# Altium PCB 3-D-Version-Multi_HUTSCHIENE_1_1.PcbDoc
Units mm, origin at the board's own origin, x right, y up, seen from the top; angles counter-clockwise.
Board outline 29.21 x 81.99 mm, 4 copper layers (Top Layer, 3V3, GND, Bottom Layer), stack 0.778 mm thick; 61 components, 55 nets, 681 pads, 79 vias.
Unrouted connection lines stored in the file: 1.
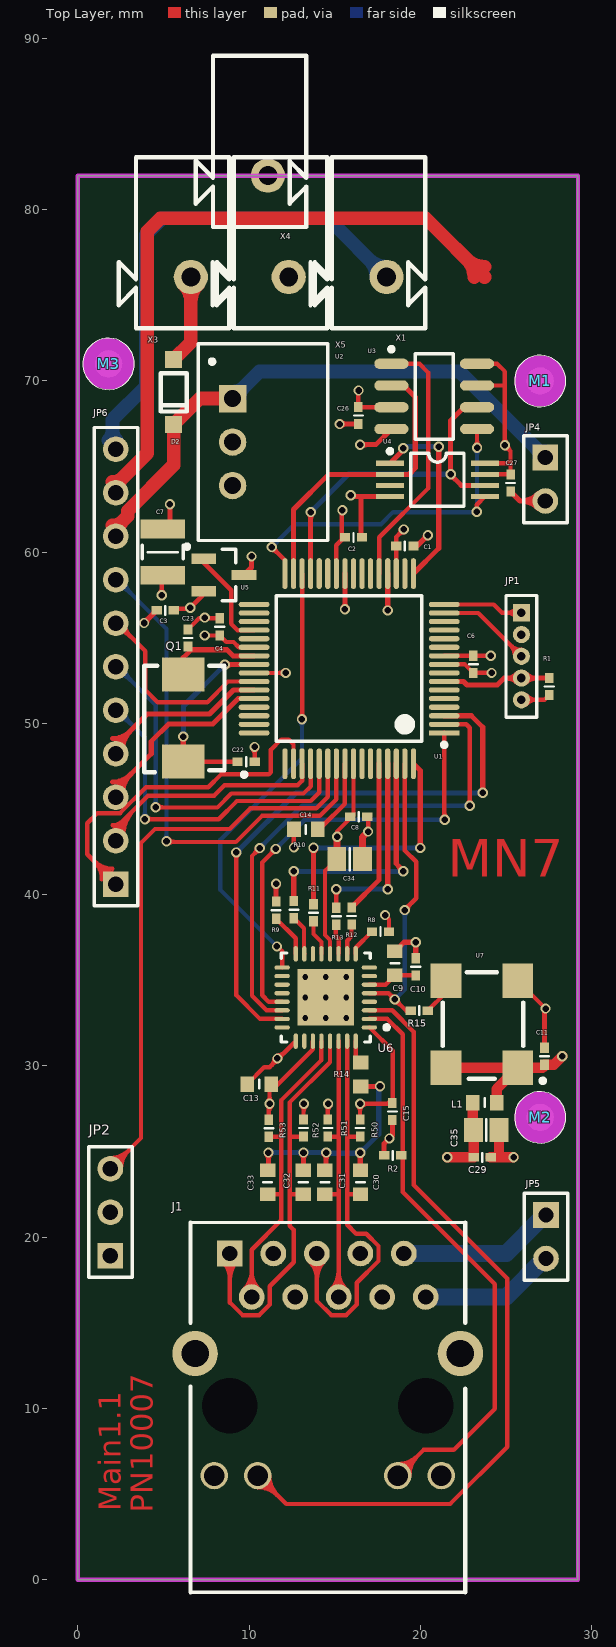
[diagram p0: Top Layer view]
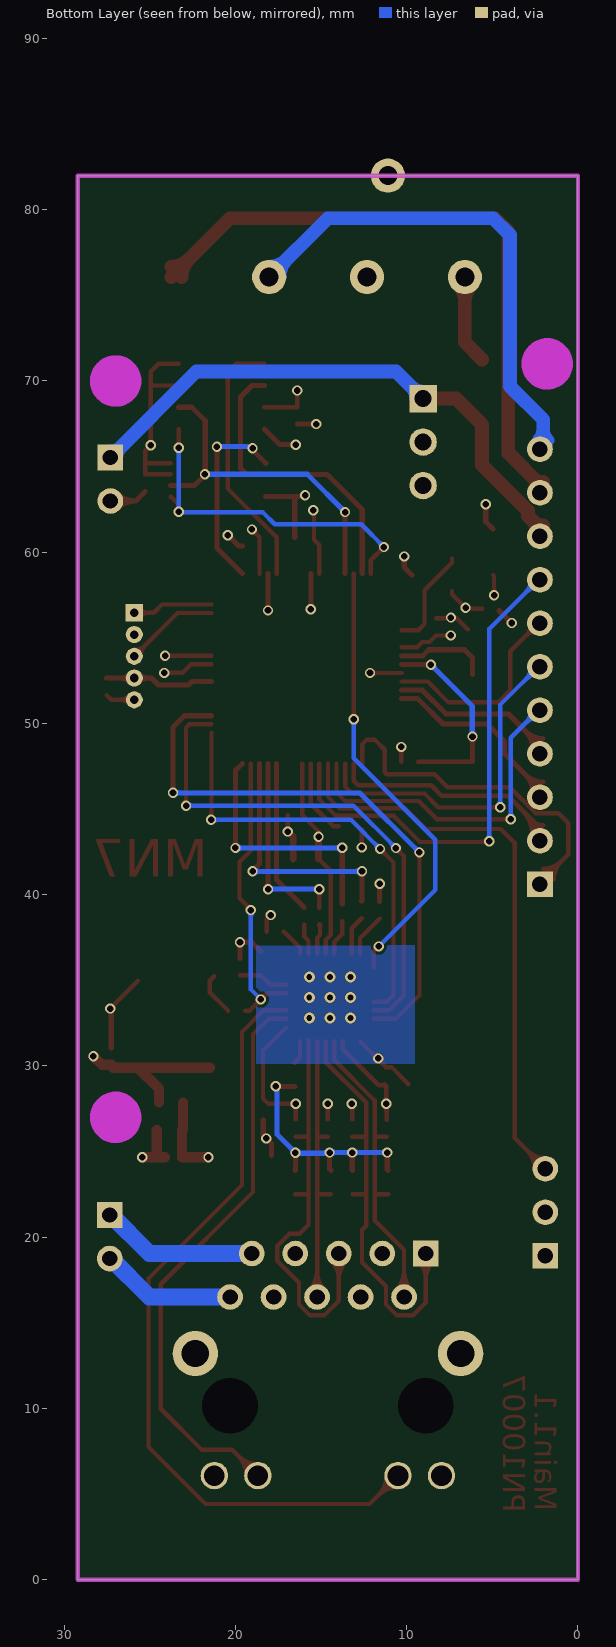
[diagram p1: Bottom Layer view, seen from below]
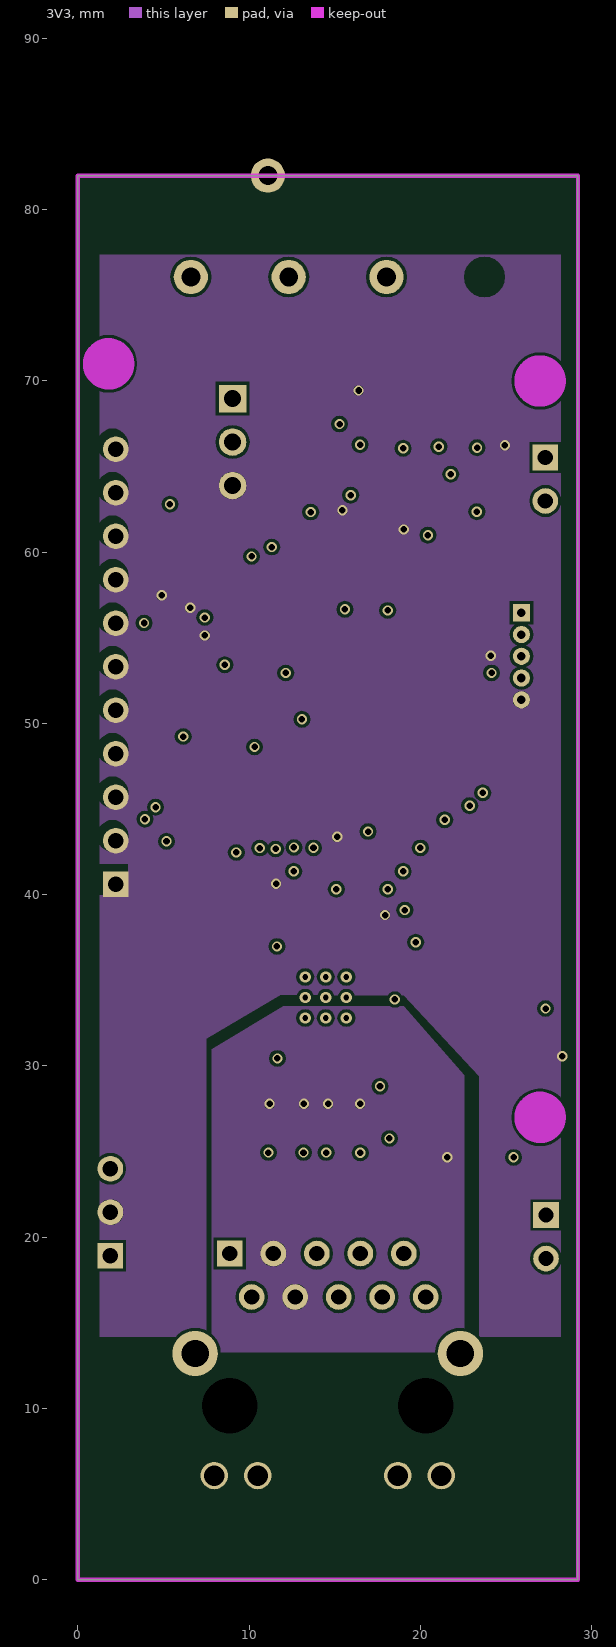
[diagram p2: 3V3]
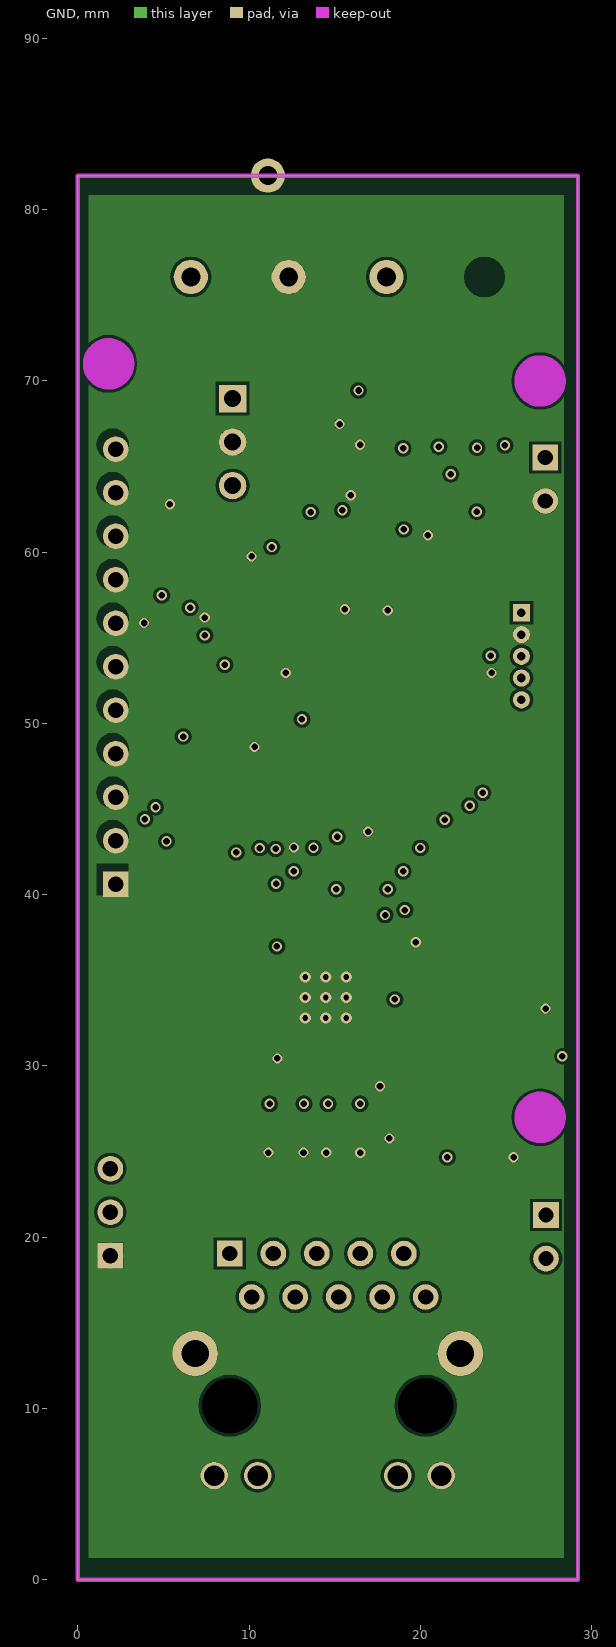
[diagram p3: GND]

## Layer stack, top to bottom
Top Solder: solder mask 0.0102, Solder Resist, Dk 3.5
Top Layer: signal copper 0.0356
Dielectric 1: core 0.254, FR-4, Dk 4.2
3V3: signal copper 0.036
Dielectric 3: prepreg 0.127, Dk 4.2
GND: signal copper 0.036
Dielectric 2: core 0.254, Dk 4.2
Bottom Layer: signal copper 0.0356
Bottom Solder: solder mask 0.0102, Solder Resist, Dk 3.5

## Board outline
0,0 0,81.991 29.21,81.991 29.21,0

## Design rules (kind name [scope] priority, off if disabled: settings)
Clearance AT90 [IsPad vs IsPad] p1: gap=0.1
Clearance [All] p2: gap=0.18
ComponentClearance ComponentClearance_1 [(HasFootprint('WAGO-243-211') AND HasFootprint('WAGO-243-211'))] p1: gap=0 collisioncheckmode=3 verticalgap=0 showdistances=FALSE
ComponentClearance [All] p2: gap=0.254 collisioncheckmode=3 verticalgap=0.254 showdistances=FALSE
HoleSize [All] p1: absolutevalues=TRUE maxlimit=4 minlimit=0.025 maxpercent=80.000 minpercent=20.000
MinimumAnnularRing [HasFootprint('32M1-A_M')] p1: minimumring=0.12
MinimumSolderMaskSliver MinimumSolderMaskSliver_2 [HasFootprint('HDR1X5-1.27')] p1: minsoldermaskwidth=0.05
MinimumSolderMaskSliver MinimumSolderMaskSliver_1 [HasFootprint('32M1-A_M')] p2: minsoldermaskwidth=0
MinimumSolderMaskSliver [All] p3: minsoldermaskwidth=0.1
PolygonConnect [All vs (InNet('GND') AND InPadClass('All Pads'))] p1: connectstyle=Relief reliefconductorwidth=0.254 reliefentries=4 polygonreliefangle="90 Angle" airgapwidth=0
RoomDefinition Ethernet [InComponentClass('Ethernet')] p1: confinementstyle=ConfineIn formatcopy=TRUE lockcomponents=FALSE outline -7.874,-2.972 48.336,-2.972 48.336,87.249 -7.874,87.249
RoomDefinition MCU [InComponentClass('MCU')] p2: confinementstyle=ConfineIn formatcopy=TRUE lockcomponents=FALSE outline -6.35,-3.334 50.838,-3.334 50.838,86.36 -6.35,86.36
RoutingVias [All] p1: holewidth=0.381 width=0.584 viastyle="Through Hole" minholewidth=0.3 minwidth=0.3 maxholewidth=0.711 maxwidth=1.27
ShortCircuit ShortCircuit_1 [U6 vs IsVia] p1: allowed=TRUE
ShortCircuit [All] p2: allowed=FALSE
SilkToBoardRegionClearance [(HasFootprint('7499210121A') AND IsEmbeddedBoard)] p1:
SilkToSilkClearance [All] p1: silktosilkclearance=0.13
SilkToSolderMaskClearance [IsPad] p1: minsilkscreentomaskgap=0.13 clearancetoexposedcopper=TRUE
SolderMaskExpansion [All] p1: expansion=0.102
Width [All] p1: maxlimit=2 minlimit=0.254 preferedwidth=0.254
22 further rules are at their usual default settings.

## Classes and differential pairs
component class Ethernet: C9 C10 C11 C13 C15 C29 C30 C31 C32 C33 C34 C35 J1 JP4 JP5 L1 R2 R8 R9 R10 R11 R12 R13 R14 R15 R50 R51 R52 R53 U6 U7
component class MCU: C1 C3 C4 C6 C7 C8 C14 C22 C23 C26 C27 D2 JP1 JP2 JP6 M1 M2 M3 Q1 R1 U1 U2 U3 U4 U5 X1 X3 X4 X5

## Components (designator, comment, footprint, x,y, rotation, side; value= is the part's Value field where it differs from the comment)
C1 "100nF16V_0402" C0402 19.101,60.363 r0 top
C2 "100nF16V_0402" C0402 16.104,60.871 r0 top
C3 "100nF16V_0402" C0402 5.105,56.604 r180 top
C4 "100nF16V_0402" C0402 8.293,55.639 r90 top
C6 "100nF16V_0402" C0402 23.101,53.454 r270 top
C7 "10uF25V_1210" C1210 4.966,60.008 r90 top
C8 "100nF25V_0402" C0402 16.408,44.552 r0 top
C9 "1uF50V_0603" C0603 18.517,35.992 r90 top
C10 "470pF50V_0402" C0402 19.736,35.789 r90 top
C11 "100nF16V_0402" C0402 27.254,30.569 r90 top
C13 "22nF50V_0603" C0603 10.604,28.943 r180 top
C14 "10uF10V_0603" C0603 13.322,43.815 r180 top
C15 "100nF25V_0402" C0402 18.377,27.343 r270 top
C22 "22pF50V_0402" C0402 9.83,47.765 r0 top
C23 "22pF50V_0402" C0402 6.439,54.991 r90 top
C26 "100nF16V_0402" C0402 16.383,67.983 r270 top
C27 "100nF16V_0402" C0402 25.273,64.041 r270 top
C29 "100nF25V_0402" C0402 23.622,24.663 r0 top
C30 "10pF50V_0603" C0603 16.51,23.216 r90 top
C31 "10pF50V_0603" C0603 14.427,23.216 r90 top
C32 "10pF50V_0603" C0603 13.17,23.216 r90 top
C33 "10pF50V_0603" C0603 11.087,23.216 r90 top
C34 "4u7F25V_0805" C0805 15.875,42.075 r0 top
C35 "4u7F25V_0805" C0805 23.851,26.264 r0 top
D2 "SD103AW-V-GS08" SOD123 5.601,69.355 r270 top
J1 "7499210121A" 7499210121A 14.6,10.16 r180 top locked
JP1 "ICDI" HDR1X5-1.27 25.908,53.924 r270 top
JP2 "Header-3" HDR1X3 1.905,21.463 r90 top
JP4 "Header-2" HDR1X2 27.305,64.262 r270 top
JP5 "Header-2" HDR1X2 27.343,20.028 r270 top
JP6 "Header 11_2.54" HDR1X11_2.54 2.222,40.615 r90 top
L1 "120R4A_0603" L0603 23.762,27.864 r0 top
M1 "Mark" Mark-3mm 27,70 r0 top
M2 "Mark" Mark-3mm 27,27 r0 top
M3 "Mark" Mark-3mm 1.8,71 r0 top
Q1 "7A-8.000MAAJ-T" TXC_7A 6.159,50.317 r90 top
R1 "10k_0402" R0402 27.534,52.159 r270 top
R2 "10k_0402" R0402 18.39,24.778 r0 top
R8 "10k_0402" R0402 17.678,37.846 r0 top
R9 "1k5_0402" R0402 11.582,39.103 r90 top
R10 "10R_0402" R0402 12.624,39.129 r90 top
R11 "10R_0402" R0402 13.767,38.951 r90 top
R12 "10R_0402" R0402 15.989,38.76 r270 top
R13 "10R_0402" R0402 15.1,38.748 r90 top
R14 "12k1_0603" R0603(1608) 16.535,29.502 r90 top
R15 "33R_0402" R0402 19.939,33.236 r180 top
R50 "49R9_0402" R0402 16.485,26.378 r90 top
R51 "49R9_0402" R0402 14.605,26.378 r90 top
R52 "49R9_0402" R0402 13.183,26.378 r90 top
R53 "49R9_0402" R0402 11.163,26.365 r90 top
U1 "PIC32MX695F512H-80I/PT" TQFP-64_N1 15.85,53.2 r180 top
U2 "R-783.3-0.5" R-783_3-0_5 9.042,66.434 r270 top
U3 "25LC1024-I_SM" SOP8_N 20.815,69.101 r0 top
U4 "23LC1024-I_ST" TSSOP8 21.006,64.224 r270 top
U5 "11AA02E48T-I_TT" SOT23_M 8.534,58.674 r0 top
U6 "LAN8741-EN" 32M1-A_M 14.482,34 r180 top
U7 "TXC-7W-50.000MBB-T" TXC_7W 23.597,32.436 r90 top
X1 "Terminal-Wago" WAGO-243-211 18.034,76.073 r0 top
X3 "Terminal-Wago" WAGO-243-211 6.604,76.073 r0 top
X4 "Terminal-Wago" WAGO-243-211 11.1,81.991 r0 top
X5 "Terminal-Wago" WAGO-243-211 12.319,76.073 r0 top

## Footprints (in the part's own frame and the unit in brackets; to place one, negate y for a bottom-side part, rotate by r counter-clockwise, add the part's x,y. Pads: shape width x height; smd on the part's side, far side on the other; paste and mask are expansions set on the pad)
32M1-A_M [mm] "QFN, 32-Leads, Body 5x5mm, Pitch 0.5mm, IPC Low Density"
  oval 0.9x0.25 smd: 1(-2.55,1.75) 2(-2.55,1.25) 3(-2.55,0.75) 4(-2.55,0.25) 5(-2.55,-0.25) 6(-2.55,-0.75) 7(-2.55,-1.25) 8(-2.55,-1.75) 17(2.55,-1.75) 18(2.55,-1.25) 19(2.55,-0.75) 20(2.55,-0.25) 21(2.55,0.25) 22(2.55,0.75) 23(2.55,1.25) 24(2.55,1.75)
  oval 0.25x0.9 smd: 9(-1.75,-2.55) 10(-1.25,-2.55) 11(-0.75,-2.55) 12(-0.25,-2.55) 13(0.25,-2.55) 14(0.75,-2.55) 15(1.25,-2.55) 16(1.75,-2.55) 25(1.75,2.55) 26(1.25,2.55) 27(0.75,2.55) 28(0.25,2.55) 29(-0.25,2.55) 30(-0.75,2.55) 31(-1.25,2.55) 32(-1.75,2.55)
  rect 3.3x3.3 smd: 33(0,0)
  silkscreen extent -3.68,-2.6 2.6,2.6, body extent -2.58,-2.58 2.58,2.58, height 1
7499210121A [mm] "Connector; PCB Jack, Thru-Hole; RJ45,POE; Shielded with Lightpipes; Right Angle"
  rect 1.5x1.5 hole 0.9: 1(5.715,-8.89)
  round 1.5 hole 0.9: 2(4.445,-6.35) 3(3.175,-8.89) 4(1.905,-6.35) 5(0.635,-8.89) 6(-0.635,-6.35) 7(-1.905,-8.89) 8(-3.175,-6.35) 9(-4.445,-8.89) 10(-5.715,-6.35)
  round 1.6 hole 1.2: 11(4.09,4.08) 12(6.63,4.08) 13(-4.09,4.08) 14(-6.63,4.08)
  round 2.65 hole 1.6: MH1(-7.745,-3.05) MH2(7.745,-3.05)
  round 2.95 hole 3.25 unplated: MH3(-5.715,0) MH4(5.715,0)
  silkscreen extent -8.02,-10.7 8.02,10.89, body extent -8,-10.67 8,11.18, height 13.74
C0402 [mm] "Chip Capacitor, Body 1.0x0.5mm, IPC High Density"
  rect 0.6x0.5 smd: 1(-0.5,0) 2(0.5,0)
  silkscreen extent 0,-0.25 0,0.25, body extent -0.55,-0.3 0.55,0.3, height 0.5
C0603 [mm] "Chip Capacitor, 0603"
  rect 0.8x0.9 smd: 1(-0.7,0) 2(0.7,0)
  silkscreen extent 0,-0.25 0,0.25, body extent -0.87,-0.48 0.87,0.48, height 0.6
C0805 [mm] "Chip Capacitor, Body 2.0x1.3mm, IPC High Density"
  rect 1.1x1.4 smd: 1(-0.75,0) 2(0.75,0)
  silkscreen extent 0,-0.64 0,0.64, body extent -1.1,-0.72 1.1,0.72, height 1.4
C1210 [mm] "Chip Capacitor, Body 3.2x2.5mm, IPC High Density"
  rect 1.1x2.6 smd: 1(-1.35,0) 2(1.35,0)
  silkscreen extent -0.4,-1.2 0.4,1.2, body extent -1.7,-1.35 1.7,1.35, height 1.3
HDR1X2 [mm] "Connector; Header; 2 Position"
  rect 1.5x1.5 hole 0.9: 1(-1.27,0)
  round 1.5 hole 0.9: 2(1.27,0)
  silkscreen extent -2.54,-1.27 2.54,1.27, body extent -2.54,-1.27 2.54,1.27, height 7
HDR1X3 [mm] "Connector; Header; 3 Position"
  rect 1.5x1.5 hole 0.9: 1(-2.54,0)
  round 1.5 hole 0.9: 2(0,0) 3(2.54,0)
  silkscreen extent -3.81,-1.27 3.81,1.27, body extent -3.81,-1.27 3.81,1.27, height 7
HDR1X5-1.27 [mm] "Connector; Header; 5 Position"
  rect 1x1 hole 0.5: 1(-2.54,0)
  round 1 hole 0.5: 2(-1.27,0) 3(0,0) 4(1.27,0) 5(2.54,0)
  silkscreen extent -3.55,-0.9 3.55,0.9, body extent -3.56,-0.89 3.56,0.89, height 7
HDR1X11_2.54 [mm] "Connector; Header; 11 Position"
  rect 1.5x1.5 hole 0.9: 1(0,0)
  round 1.5 hole 0.9: 2(2.54,0) 3(5.08,0) 4(7.62,0) 5(10.16,0) 6(12.7,0) 7(15.24,0) 8(17.78,0) 9(20.32,0) 10(22.86,0) 11(25.4,0)
  silkscreen extent -1.27,-1.27 26.67,1.27, body extent -1.27,-1.27 26.67,1.27, height 7
L0603 [mm] "Chip Ferrit, 0603"
  rect 0.8x0.9 smd: 1(-0.7,0) 2(0.7,0)
  silkscreen extent 0,-0.25 0,0.25, body extent -0.87,-0.48 0.87,0.48, height 0.6
Mark-3mm [mm]
  round 1.6 smd paste-2: 0(0,0)
  Keep-Out Layer circle w2: c0,0 r0.5
  silkscreen extent -1.5,-1.5 1.5,1.5
R0402 [mm] "Chip Resistor, Body 1.0x0.5mm"
  rect 0.6x0.5 smd: 1(-0.5,0) 2(0.5,0)
  silkscreen extent 0,-0.25 0,0.25, body extent -0.55,-0.3 0.55,0.3, height 0.55
R0603(1608) [mm] "Chip Resistor, 0603"
  rect 0.8x0.9 smd: 1(-0.7,0) 2(0.7,0)
  body extent -0.87,-0.48 0.87,0.48, height 0.6
R-783_3-0_5 [mm] "Recon DC-DC"
  rect 1.6x1.6 hole 1: 1(-2.54,0)
  round 1.6 hole 1: 2(0,0) 3(2.54,0)
  silkscreen extent -5.75,-2 5.75,5.55, body extent -5.72,-2.03 5.72,5.59, height 10.2
SOD123 [mm]
  rect 1x1 smd: 1(1.905,0) 2(-1.905,0)
  silkscreen extent -1.1,-0.76 1.14,0.76, body extent -1.4,-0.85 1.4,0.88, height 1.4
SOP8_N [mm] "SOIC, 8-Leads, Body 4.9x3.9mm, Pitch 1.27mm, IPC Medium Density"
  oval 2x0.6 smd: 1(-2.5,1.905) 2(-2.5,0.635) 3(-2.5,-0.635) 4(-2.5,-1.905) 5(2.5,-1.905) 6(2.5,-0.635) 7(2.5,0.635) 8(2.5,1.905)
  silkscreen extent -2.62,-2.5 1.1,2.88, body extent -2,-2.5 2,2.5, height 1.75
SOT23_M [mm] "SOT23, 3-Leads, Body 2.9x1.3mm, Pitch 0.95mm, Lead Span 2.3mm - Reverse Pinning, IPC Low Density"
  rect 1.45x0.6 smd: 1(1.175,0) 2(-1.175,-0.95) 3(-1.175,0.95)
  silkscreen extent -2.28,-1.5 0.7,1.78, body extent -0.7,-1.5 0.7,1.5, height 1.1
TQFP-64_N1 [mm] "64-Pin Thin Plastic Quad Flat Pack 0.5 mm Pitch, 1.0/0.1 mm Lead Form, IPC Medium Density"
  rect 1.8x0.3 smd: 1(-5.55,3.75)
  oval 1.8x0.3 smd: 2(-5.55,3.25) 3(-5.55,2.75) 4(-5.55,2.25) 5(-5.55,1.75) 6(-5.55,1.25) 7(-5.55,0.75) 8(-5.55,0.25) 9(-5.55,-0.25) 10(-5.55,-0.75) 11(-5.55,-1.25) 12(-5.55,-1.75) 13(-5.55,-2.25) 14(-5.55,-2.75) 15(-5.55,-3.25) 16(-5.55,-3.75) 33(5.55,-3.75) 34(5.55,-3.25) 35(5.55,-2.75) 36(5.55,-2.25) 37(5.55,-1.75) 38(5.55,-1.25) 39(5.55,-0.75) 40(5.55,-0.25) 41(5.55,0.25) 42(5.55,0.75) 43(5.55,1.25) 44(5.55,1.75) 45(5.55,2.25) 46(5.55,2.75) 47(5.55,3.25) 48(5.55,3.75)
  oval 0.3x1.8 smd: 17(-3.75,-5.55) 18(-3.25,-5.55) 19(-2.75,-5.55) 20(-2.25,-5.55) 21(-1.75,-5.55) 22(-1.25,-5.55) 23(-0.75,-5.55) 24(-0.25,-5.55) 25(0.25,-5.55) 26(0.75,-5.55) 27(1.25,-5.55) 28(1.75,-5.55) 29(2.25,-5.55) 30(2.75,-5.55) 31(3.25,-5.55) 32(3.75,-5.55) 49(3.75,5.55) 50(3.25,5.55) 51(2.75,5.55) 52(2.25,5.55) 53(1.75,5.55) 54(1.25,5.55) 55(0.75,5.55) 56(0.25,5.55) 57(-0.25,5.55) 58(-0.75,5.55) 59(-1.25,5.55) 60(-1.75,5.55) 61(-2.25,5.55) 62(-2.75,5.55) 63(-3.25,5.55) 64(-3.75,5.55)
  silkscreen extent -5.68,-4.25 4.25,4.57, body extent -5,-5 5,5, height 1.2
TSSOP8 [mm] "Shrink Small Outline, Plastic, Thin; 8 Leads; Body Width 4.4 mm; Pitch 0.65 mm"
  rect 0.3x1.65 smd: 1(-0.975,-2.775) 2(-0.325,-2.775) 3(0.325,-2.775) 4(0.975,-2.775) 5(0.975,2.775) 6(0.325,2.775) 7(-0.325,2.775) 8(-0.975,2.775)
  silkscreen extent -1.8,-2.9 1.55,1.55, body extent -1.52,-1.52 1.52,1.52, height 1
TXC_7A [mm]
  rect 2x2.5 smd: 1(-2.54,0) 2(2.54,0)
  silkscreen extent -3.43,-3.68 3.05,2.29, body extent -3.17,-2.41 3.05,2.25, height 1.3
TXC_7W [mm]
  rect 2x1.8 smd: 1(-2.54,-2.1) 2(2.54,-2.1) 3(2.54,2.1) 4(-2.54,2.1)
  silkscreen extent -3.43,-3.68 3.05,2.29, body extent -3.17,-2.41 3.05,2.25, height 1.3
WAGO-243-211 [mm]
  round 2 hole 1.1: 1(0,0)
  silkscreen extent -4.2,-3 2.25,7, body extent -4.19,-3.05 2.29,6.98, height 10

## Part data
C1 C2 C3 C4 C6 C7 C11 C14 C26 C27: "Capacitor"
C8 C15 C29: "AVX, X5R, 10%, 25V"
C9: "C series, X5R, 10%"
C10: "AVX, 50V"
C13: "AVX ,  X7R, 5%, 50V"
C22 C23: "Murata, GRM series, 50V"
C30 C31 C32 C33: "AVX ,  +-0.5pF, 50V"
C34 C35: "TDK  C series, X7R, 10%, 25V"
D2: "Diode Schottky,2A,40V"
J1: library part "Ethernet, POE, WE7499210121A", "Modular Jack , Right Angle RJ-45, Low Profile"
JP1 JP4 JP5: "Header, 5-Pin"
JP2: "Header-3-Pin"
JP6: "Header, 11-Pin"
L1: "Murata, Ferrit, 120Rx2A"
Q1: library part Crystal_8MHz, "Crystal, 7A-8.000MAAJ-T"
R1 R2 R8 R9 R10 R11 R12 R13: "Vishay CRCW series, 125mW, 1%"
R14: "Vishay, CRCW series, 100mW, 1%"
R15 R50 R51 R52 R53: "Vishay CRCW series, 63mW, 1%"
U1: "High Performance ROM-less Microcontroller with External Memory Bus, 1.5K RAM, 64-Pin TQFP, 4.2 to 5.5V Supply Range, Industrial Temperature"
U2: library part Recom-R-783_3-0_5, "Voltage Regulator"
U3: "1024 Kbit Serial SPI Bus EEPROM"
U4: "1 Mbit Serial  EEPROM"
U5: "2 kbit Serial  EEPROM"
U6: "Ethernet Phy"
U7: "Crystal"
X1 X3 X4 X5: "BNC Elbow Connector"

## Free pads (board coordinates)
  round 0.584 on Mech13: 1(1.981,29.058) 1(2.515,38.684) 1(3.505,27.203) 1(4.724,24.308) 1(4.851,30.328) 1(5.512,71.196) 1(5.664,62.382) 1(5.994,63.703) 1(5.994,65.684) 1(5.994,67.183) 1(7.01,35.687) 1(7.01,40.183) 1(8.407,59.182) 1(8.509,36.703) 1(8.661,24.181) 1(8.712,29.388) 1(8.712,32.309) 1(8.992,53.188) 1(9.119,54.966) 1(9.525,25.578) 1(10.008,41.707) 1(12.014,44.602) 1(12.014,51.689) 1(12.014,60.706) 1(12.497,34.696) 1(12.497,46.203) 1(12.7,40.03) 1(12.751,56.109) 1(13.513,46.355) 1(13.767,71.171) 1(13.995,44.704) 1(14.021,50.8) 1(14.503,30.683) 1(14.503,36.195) 1(14.503,37.186) 1(14.503,38.202) 1(14.503,57.201) 1(14.834,66.192) 1(15.189,40.691) 1(15.443,60.731) 1(15.494,24.206) 1(15.494,36.195) 1(15.494,37.186) 1(15.494,38.202) 1(16.231,46.203) 1(16.51,36.195) 1(16.51,37.186) 1(16.51,38.202) 1(16.51,52.705) 1(16.993,46.203) 1(17.501,44.704) 1(18.517,31.699) 1(19.05,40.462) 1(19.507,39.192) 1(19.71,54.102) 1(20.168,31.445) 1(20.498,24.206) 1(20.498,32.207) 1(21.006,28.702)
  round 0.584 on Mech15: 1(1.981,29.058) 1(2.515,38.684) 1(3.505,27.203) 1(4.724,24.308) 1(4.851,30.328) 1(5.512,71.196) 1(5.664,62.382) 1(5.994,63.703) 1(5.994,65.684) 1(5.994,67.183) 1(7.01,35.687) 1(7.01,40.183) 1(8.407,59.182) 1(8.509,36.703) 1(8.661,24.181) 1(8.712,29.388) 1(8.712,32.309) 1(8.992,53.188) 1(9.119,54.966) 1(9.525,25.578) 1(10.008,41.707) 1(12.014,44.602) 1(12.014,51.689) 1(12.014,60.706) 1(12.497,34.696) 1(12.497,46.203) 1(12.7,40.03) 1(12.751,56.109) 1(13.513,46.355) 1(13.767,71.171) 1(13.995,44.704) 1(14.021,50.8) 1(14.503,30.683) 1(14.503,36.195) 1(14.503,37.186) 1(14.503,38.202) 1(14.503,57.201) 1(14.834,66.192) 1(15.189,40.691) 1(15.443,60.731) 1(15.494,24.206) 1(15.494,36.195) 1(15.494,37.186) 1(15.494,38.202) 1(16.231,46.203) 1(16.51,36.195) 1(16.51,37.186) 1(16.51,38.202) 1(16.51,52.705) 1(16.993,46.203) 1(17.501,44.704) 1(18.517,31.699) 1(19.05,40.462) 1(19.507,39.192) 1(19.71,54.102) 1(20.168,31.445) 1(20.498,24.206) 1(20.498,32.207) 1(21.006,28.702)
  oval 3.048x1.524 on Mech13: 1(2.007,18.923) 1(2.007,21.463) 1(2.007,24.003) 1(2.007,40.996) 1(2.007,43.536) 1(2.007,46.076) 1(2.007,48.616) 1(2.007,51.156) 1(2.007,53.696) 1(2.007,56.236) 1(2.007,58.776) 1(2.007,61.316) 1(2.007,63.856) 1(2.007,66.396) 1(18.644,63.221) 1(18.644,65.761) 1(18.644,68.301) 1(27.254,18.821) 1(27.254,21.361) 1(27.305,62.967) 1(27.305,65.507)
  oval 3.048x1.524 on Mech15: 1(2.007,18.923) 1(2.007,21.463) 1(2.007,24.003) 1(2.007,40.996) 1(2.007,43.536) 1(2.007,46.076) 1(2.007,48.616) 1(2.007,51.156) 1(2.007,53.696) 1(2.007,56.236) 1(2.007,58.776) 1(2.007,61.316) 1(2.007,63.856) 1(2.007,66.396) 1(18.644,63.221) 1(18.644,65.761) 1(18.644,68.301) 1(27.254,18.821) 1(27.254,21.361) 1(27.305,62.967) 1(27.305,65.507)
  rect 1.118x1.016 on Mech15: 1(2.02,30.074) 1(3.734,30.074) 1(8.28,22.555) 1(9.754,34.976) 1(9.994,22.555) 1(11.467,34.976) 1(11.862,41.72) 1(11.862,43.434) 1(12.18,26.035) 1(13.894,26.035) 1(13.894,41.72) 1(13.894,43.434) 1(15.316,26.035) 1(15.9,41.72) 1(15.9,43.434) 1(16.561,53.746) 1(17.03,26.035) 1(17.819,33.147) 1(17.932,41.72) 1(17.932,43.434) 1(18.274,53.746) 1(19.241,22.555) 1(19.533,33.147) 1(20.955,22.555)
  rect 1.524x1.6 on Mech15: 1(2.24,32.019) 1(2.24,37.135) 1(6.045,32.019) 1(6.045,37.135)
  rect 1.016x1.118 on Mech15: 1(4.953,25.476) 1(4.953,27.19) 1(6.033,39.065) 1(7.747,39.065) 1(7.823,53.264) 1(7.823,54.977) 1(8.421,30.683) 1(9.322,26.684) 1(9.322,28.397) 1(9.423,38.723) 1(9.423,40.437) 1(9.779,32.944) 1(10.135,30.683) 1(11.455,38.698) 1(11.455,40.411) 1(11.493,32.944) 1(11.786,56.947) 1(11.786,58.66) 1(12.167,29.185) 1(13.88,29.185) 1(14.021,48.045) 1(14.021,49.759) 1(14.122,22.67) 1(14.122,24.384) 1(15.279,29.21) 1(15.596,57.023) 1(15.596,58.737) 1(16.993,29.21) 1(19.152,30.175) 1(20.865,30.175)
  rect 1.016x1.422 on Mech13: 1(5.248,58.971) 1(6.198,61.189) 1(7.163,58.971)
  rect 1.016x1.118 on Mech13: 1(6.121,68.199) 1(6.121,69.913) 1(7.137,63.703) 1(7.137,65.417) 1(14.212,41.758) 1(15.926,41.758) 1(17.221,41.758) 1(18.935,41.758)
  rect 0.864x0.711 on Mech15: 1(6.288,27.33) 1(7.899,27.33)
  round 1.676 on Mech13: 1(6.452,76.2) 1(12.192,76.2) 1(17.932,76.2) 1(23.698,76.2)
  round 1.676 on Mech15: 1(6.452,76.2) 1(12.192,76.2) 1(17.932,76.2) 1(23.698,76.2)
  round 2.362 on Mech13: 1(6.782,13.335) 1(22.276,13.335)
  round 2.362 on Mech15: 1(6.782,13.335) 1(22.276,13.335)
  rect 1.118x1.016 on Mech13: 1(7.01,37.338) 1(7.01,39.052) 1(16.092,39.726) 1(17.805,39.726) 1(23.012,51.791) 1(23.012,53.504)
  rect 1.473x0.279 on Mech13: 1(7.264,49.555) 1(7.264,50.063) 1(7.264,50.571) 1(7.264,51.054) 1(7.264,51.562) 1(7.264,52.07) 1(7.264,52.553) 1(7.264,53.061) 1(7.264,53.569) 1(7.264,54.077) 1(7.264,54.559) 1(7.264,55.067) 1(7.264,55.575) 1(7.264,56.058) 1(7.264,56.566) 1(7.264,57.074) 1(18.491,49.555) 1(18.491,50.063) 1(18.491,50.571) 1(18.491,51.054) 1(18.491,51.562) 1(18.491,52.07) 1(18.491,52.553) 1(18.491,53.061) 1(18.491,53.569) 1(18.491,54.077) 1(18.491,54.559) 1(18.491,55.067) 1(18.491,55.575) 1(18.491,56.058) 1(18.491,56.566) 1(18.491,57.074)
  round 1.524 on Mech13: 1(7.747,5.715) 1(7.747,7.747) 1(21.311,5.715) 1(21.311,7.747)
  round 1.524 on Mech15: 1(7.747,5.715) 1(7.747,7.747) 1(21.311,5.715) 1(21.311,7.747)
  rect 2.21x0.61 on Mech13: 1(8.811,67.158) 1(8.811,68.428) 1(8.811,69.698) 1(8.811,70.968) 1(15.494,67.158) 1(15.494,68.428) 1(15.494,69.698) 1(15.494,70.968)
  round 3.2 on Mech13: 1(8.814,10.287) 1(20.244,10.287)
  round 3.2 on Mech15: 1(8.814,10.287) 1(20.244,10.287)
  round 1.333 on Mech13: 1(8.814,19.177) 1(10.084,16.637) 1(11.354,19.177) 1(12.624,16.637) 1(13.894,19.177) 1(15.164,16.637) 1(18.974,19.177) 1(20.244,16.637)
  round 1.333 on Mech15: 1(8.814,19.177) 1(10.084,16.637) 1(11.354,19.177) 1(12.624,16.637) 1(13.894,19.177) 1(15.164,16.637) 1(18.974,19.177) 1(20.244,16.637)
  round 0.61 on Mech13: 1(8.992,66.192) 1(9.449,62.535) 1(9.5,49.2) 1(10.008,50.19) 1(12.014,65.202) 1(13.945,62.535) 1(16.002,62.687) 1(17.501,59.182) 1(19.99,48.692) 1(20.676,49.403) 1(21.514,50.19)
  round 0.61 on Mech15: 1(8.992,66.192) 1(9.449,62.535) 1(9.5,49.2) 1(10.008,50.19) 1(12.014,65.202) 1(13.945,62.535) 1(16.002,62.687) 1(17.501,59.182) 1(19.99,48.692) 1(20.676,49.403) 1(21.514,50.19)
  rect 0.279x1.473 on Mech13: 1(9.119,47.701) 1(9.119,58.928) 1(9.627,47.701) 1(9.627,58.928) 1(10.135,47.701) 1(10.135,58.928) 1(10.617,47.701) 1(10.617,58.928) 1(11.125,47.701) 1(11.125,58.928) 1(11.633,47.701) 1(11.633,58.928) 1(12.116,47.701) 1(12.116,58.928) 1(12.624,47.701) 1(12.624,58.928) 1(13.132,47.701) 1(13.132,58.928) 1(13.64,47.701) 1(13.64,58.928) 1(14.122,47.701) 1(14.122,58.928) 1(14.63,47.701) 1(14.63,58.928) 1(15.138,47.701) 1(15.138,58.928) 1(15.621,47.701) 1(15.621,58.928) 1(16.129,47.701) 1(16.129,58.928) 1(16.637,47.701) 1(16.637,58.928)
  rect 1.219x0.356 on Mech13: 1(9.216,63.576) 1(9.216,64.237) 1(9.216,64.892) 1(9.216,65.542) 1(15.088,63.576) 1(15.088,64.237) 1(15.088,64.892) 1(15.088,65.542)
  rect 1.524x1.321 on Mech15: 1(12.014,48.299) 1(12.014,50.013)
  rect 0.813x0.305 on Mech15: 1(12.979,35.306) 1(12.979,35.814) 1(12.979,36.297) 1(12.979,36.805) 1(12.979,37.313) 1(12.979,37.821) 1(12.979,38.303) 1(12.979,38.811) 1(17.805,35.306) 1(17.805,35.814) 1(17.805,36.297) 1(17.805,36.805) 1(17.805,37.313) 1(17.805,37.821) 1(17.805,38.303) 1(17.805,38.811)
  rect 0.305x0.813 on Mech15: 1(13.64,34.646) 1(13.64,39.472) 1(14.148,34.646) 1(14.148,39.472) 1(14.63,34.646) 1(14.63,39.472) 1(15.138,34.646) 1(15.138,39.472) 1(15.646,34.646) 1(15.646,39.472) 1(16.154,34.646) 1(16.154,39.472) 1(16.637,34.646) 1(16.637,39.472) 1(17.145,34.646) 1(17.145,39.472)
  rect 3.302x3.302 on Mech15: 1(15.392,37.059)
  round 0.762 on Mech13: 1(21.26,52.197) 1(21.26,53.467) 1(21.26,54.737) 1(21.26,56.007)
  round 0.762 on Mech15: 1(21.26,52.197) 1(21.26,53.467) 1(21.26,54.737) 1(21.26,56.007)
  rect 0.762x0.762 on Mech13: 1(21.26,57.277)
  rect 0.762x0.762 on Mech15: 1(21.26,57.277)
  rect 0.813x1.6 on Mech15: 1(21.514,68.506) 1(21.514,71.907)
  rect 1.803x1.6 on Mech15: 1(21.996,62.786) 1(21.996,65.608)

## Via types
v1: diameter 0.6, hole 0.381, Top Layer to Bottom Layer, 70 vias
v2: diameter 0.66, hole 0.33, Top Layer to Bottom Layer, tented top, 9 vias

## Nets (pads, with @x,y where several pads share a name; then routed paths per layer and width w, separated by ;. In a path a pad name is that pad's centre, name@x,y a point inside that pad or via, vN(x,y) a via of type N, cw(c..) or ccw(c..) an arc to the next point about the centre after c; other vN are vias at no path point)
3V3: C1.1 C2.1 C3.1 C4.1 C6.1 C7.1 C8.1 C11.1 C26.1 C27.1 C34.1 JP1.5 JP2.2 L1.2 R1.2 R8.2 R9.2 U1.10 U1.19 U1.26 U1.38 U1.57 U2.3 U3.3 U3.7 U3.8 U4.7 U4.8 U5.2 U6.12 U7.1 U7.4 | length 62
  Top Layer w0.254: v1@4.78,57.603 ccw(c4.485,57.898) 4.902,57.898 ccw(c5.32,57.898) v1@5.025,57.603 ; v1(4.902,57.48) 4.902,58.594 C7.1 ; C3.1@5.593,56.693 6.502,56.693 v1(6.566,56.756) 7.359,57.55 U5.2 ; v1(7.421,55.139) C4.1 8.67,54.762 9.091,54.762 9.403,54.45 U1.38 ; U6.12 14.732,37.355 14.442,37.645 14.442,41.392 C34.1 ; U1.26 15.1,60.413 15.418,60.731 15.418,62.573 15.456,62.535 v1(15.456,62.452) v1@15.456,62.37 ; v1(15.146,43.383) 15.146,43.696 16.1,44.649 U1.57 ; v1(16.396,69.444) 16.383,69.431 C26.1 16.4,68.466 U3.3 ; v1(17.945,38.811) 18.178,38.578 R8.2 ; U1.19 C1.1 C1.1 18.601,60.892 v1(19.037,61.328) ; v1@18.864,61.328 cw(c18.447,61.328) 18.742,61.033 cw(c19.037,60.738) v1@19.037,61.155 ; U1.10 23.097,53.95 C6.1 v1(24.109,53.954) v1@24.206,54.051 ; U3.7 24.943,69.736 ; U3.8 24.486,71.006 24.943,70.549 24.943,69.736 ; U4.7 25.266,64.549 C27.1 25.273,65.151 ; U4.8 25.225,65.199 25.273,65.151 ; v1@24.82,66.366 ccw(c24.525,66.661) 24.943,66.661 ccw(c25.36,66.661) v1@25.065,66.366 ; v1@24.943,66.07 cw(c24.943,65.653) 25.238,65.948 cw(c25.533,66.243) v1@25.116,66.243 ; JP1.5 27.259,51.384 R1.2 ; JP1.5@26.172,51.12 cw(c26.808,50.484) 26.808,51.384 cw(c26.808,52.285) JP1.5@26.172,51.648 ; 24.943,69.736 v1(24.943,66.243) 25.273,65.913 25.273,65.151
  Top Layer w0.3: v1@11.476,40.534 cw(c11.22,40.278) 11.582,40.278 cw(c11.945,40.278) v1@11.688,40.534 ; R9.2 v1(11.582,40.64) ; C34.1 C34.1@15.146,42.097
  Top Layer w0.4: C34.1@15.146,42.097 v1(15.146,43.383)
  Top Layer w0.6: U7.4 U7.1 ; L1.2 24.462,28.661 U7.1 ; C11.1 C11.1@27.318,30.069 ; v1(28.296,30.569) 27.796,30.069 C11.1@27.318,30.069 ; U7.1 27.145,29.896 C11.1@27.318,30.069
12V: D2.1 JP4.1 JP6.9 U2.1 | length 38.5
  Top Layer w0.8: JP6.9@2.032,61.214 2.924,62.106 2.924,62.411 5.601,65.087 D2.1 7.125,68.974 U2.1 ; JP6.9@2.032,61.564 ccw(c2.032,62.409) 2.629,61.811 ccw(c3.227,61.214) JP6.9@2.382,61.214 ; U2.1@8.76,68.691 ccw(c8.077,68.008) 8.077,68.974 ccw(c8.077,69.939) U2.1@8.76,69.257
  Bottom Layer w0.8: U2.1 10.617,70.549 22.288,70.549 JP4.1 ; U2.1@9.042,69.374 ccw(c9.042,70.339) 9.725,69.657 ccw(c10.408,68.974) U2.1@9.442,68.974 ; JP4.1@26.955,65.532 ccw(c26.11,65.532) 26.708,66.129 ccw(c27.305,66.727) JP4.1@27.305,65.882
GND: C1.2 C2.2 C3.2 C4.2 C6.2 C7.2 C8.2 C9.2 C10.2 C11.2 C13.2 C14.2 C15.2 C22.2 C23.2 C26.2 C27.2 C29.2 C30.2 C31.2 C32.2 C33.2 C34.2 C35.2 J1.12 J1.14 J1.MH1 J1.MH2 JP1.2 JP2.1 JP4.2 R2.1 R14.1 U1.9 U1.20 U1.25 U1.41 U2.2 U3.4 U4.4 U5.1 U6.25 U6.33 U7.2 X5.1 | length 76.6
  Top Layer w0.254: C23.2 7.087,56.139 C4.2 ; C13.2 10.895,29.934 11.216,29.934 U6.25 ; v1@10.203,48.506 cw(c9.896,48.199) 10.33,48.199 ; U1.41 v1(12.145,52.95) ; v1(10.325,48.628) 10.33,48.624 C22.2 ; 10.33,48.222 cw(c10.731,48.222) v1@10.447,48.506 ; 11.317,30.035 ccw(c10.91,30.442) v1@11.486,30.442 ; 11.475,30.193 cw(c11.659,30.009) v1@11.659,30.269 ; v1@11.659,30.615 ccw(c11.659,31.19) 12.065,30.783 ; v1@11.832,30.442 cw(c12.092,30.442) 11.908,30.626 ; v1@12.023,52.828 ccw(c11.728,52.533) 11.728,52.95 ccw(c11.728,53.368) v1@12.023,53.073 ; C14.2@12.622,43.84 C14.2 12.622,42.762 v1(12.624,42.761) ; v1(16.954,43.688) C8.2@16.954,44.64 ; U1.9 22.605,53.45 C6.2 v1(24.163,52.954) ; U7.2 v1(27.318,33.355)
  Top Layer w0.3: v1(3.873,55.867) 4.605,56.599 C3.2 ; v1@3.873,56.017 ccw(c3.873,56.379) 4.13,56.123 ccw(c4.386,55.867) v1@4.023,55.867 ; C7.2 5.385,61.777 v1(5.385,62.801) ; U5.1 10.147,59.112 v1(10.147,59.753) ; v1@11.032,24.837 cw(c10.776,24.581) 11.138,24.581 cw(c11.5,24.581) v1@11.244,24.837 ; C33.2 11.138,23.967 v1(11.138,24.943) ; v1@13.077,24.837 cw(c12.82,24.581) 13.183,24.581 cw(c13.545,24.581) v1@13.289,24.837 ; C32.2 13.183,23.929 v1(13.183,24.943) ; v1@14.397,24.837 cw(c14.141,24.581) 14.503,24.581 cw(c14.866,24.581) v1@14.609,24.837 ; C31.2 14.503,23.992 v1@14.503,24.905 ; v1@15.215,67.412 v1(15.286,67.483) C26.2 ; v1@15.392,67.377 cw(c15.648,67.121) 15.648,67.483 cw(c15.648,67.845) v1@15.392,67.589 ; v1@15.494,56.773 ccw(c15.239,57.029) 15.6,57.029 ; v1@15.6,56.714 U1.25 ; 15.6,57.031 ccw(c15.963,57.031) v1@15.706,56.773 ; v1(15.938,63.335) 16.025,63.249 16.519,63.249 16.54,63.228 ; v1@16.391,24.824 cw(c16.135,24.568) 16.497,24.568 cw(c16.859,24.568) v1@16.603,24.824 ; v1(16.485,66.281) 17.401,66.281 U3.4 ; v1(16.497,24.93) 16.497,23.929 C30.2 ; R14.1 17.563,28.802 v1@17.577,28.816 ; C2.2@16.54,60.871 16.54,63.228 ; v1@16.591,66.175 cw(c16.847,65.919) 16.847,66.281 cw(c16.847,66.643) v1@16.591,66.387 ; R2.1 17.89,25.459 v1(18.199,25.768) 18.377,25.946 C15.2 ; v1@17.994,56.71 ccw(c17.739,56.965) 18.1,56.965 ; 18.1,56.967 ccw(c18.463,56.967) v1@18.206,56.71 ; U1.20 18.1,56.615 v1@18.11,56.604 ; U4.4 16.561,63.249 16.54,63.228 ; C9.2 19.048,37.224 v1(19.736,37.224) 19.774,37.224 19.736,37.186 C10.2 ; C1.2 19.812,60.363 v1(20.447,60.998) ; v1@20.297,60.998 cw(c19.935,60.998) 20.191,60.742 cw(c20.447,60.486) v1@20.447,60.848 ; C27.2 25.822,62.992 JP4.2 ; JP4.2@26.881,62.568 ccw(c25.856,61.543) 25.856,62.992 ccw(c25.856,64.441) JP4.2@26.881,63.416 ; C11.2 27.254,33.355 v1(27.318,33.355)
  Top Layer w0.4: C34.2 16.625,43.359 v1(16.954,43.688)
  Top Layer w0.6: C29.2 v1(25.451,24.663) ; 24.601,24.676 C35.2
  Bottom Layer w0.3: v1(11.138,24.943) v1(13.183,24.943) 14.465,24.943 14.503,24.905 16.472,24.905 v1(16.497,24.93) 17.577,26.01 v1@17.577,28.816 ; v1@11.244,24.837 cw(c11.5,24.581) 11.5,24.943 cw(c11.5,25.305) v1@11.244,25.049 ; v1@13.077,24.837 ccw(c12.82,24.581) 12.82,24.943 ccw(c12.82,25.305) v1@13.077,25.049 ; v1@13.289,24.837 cw(c13.545,24.581) 13.545,24.943 cw(c13.545,25.305) v1@13.289,25.049 ; 14.141,24.943 ccw(c14.141,25.306) v1@14.397,25.049 ; 14.142,24.943 cw(c14.142,24.581) v1@14.397,24.837 ; v1@14.609,25.049 ccw(c14.958,25.398) 14.958,24.905 ; 16.074,24.905 ccw(c16.074,25.354) v1@16.391,25.036 ; 16.196,24.905 cw(c16.196,24.629) v1@16.391,24.824 ; v1@16.497,25.08 ccw(c16.497,25.442) 16.753,25.186 ccw(c17.009,24.93) v1@16.647,24.93
  other v1: 14.503,24.943 17.65,28.816 11.659,30.442 7.417,56.185 18.1,56.604 15.6,56.667
  other v2: 13.282,32.8 14.482,32.8 15.682,32.8 13.282,34 14.482,34 15.682,34 13.282,35.2 14.482,35.2 15.682,35.2
NetC9_1: C9.1 C10.1 U6.6 | length 2.9
  Top Layer w0.254: U6.6 17.975,34.75 C9.1 19.733,35.292 C10.1
NetC13_1: C13.1 C15.1 C29.1 C35.1 J1.3 J1.4 L1.1 R50.2 R51.2 R52.2 R53.2 U6.1 U6.27 | length 24.2
  Top Layer w0.254: v1@11.079,27.666 cw(c10.876,27.462) 11.163,27.462 ; v1@11.079,27.91 ccw(c10.784,28.206) 11.201,28.206 ccw(c11.619,28.206) v1@11.324,27.91 ; R53.2 11.163,27.75 v1(11.201,27.788) 11.201,28.84 C13.1@11.239,28.878 ; 11.163,27.278 cw(c11.711,27.278) v1@11.324,27.666 ; C13.1 C13.1@11.239,28.878 ; v1@13.086,27.665 cw(c12.852,27.431) 13.183,27.431 ; R52.2 13.183,27.762 v1(13.208,27.788) ; 13.183,27.309 cw(c13.687,27.309) v1@13.33,27.665 ; U6.27 13.732,30.979 11.632,28.878 C13.1@11.239,28.878 ; v1@14.495,27.666 cw(c14.231,27.401) 14.605,27.401 ; R51.2 14.605,27.775 v1(14.618,27.788) ; 14.605,27.34 cw(c15.066,27.34) v1@14.74,27.666 ; v1@16.362,27.666 cw(c16.067,27.37) 16.485,27.37 cw(c16.902,27.37) 16.607,27.666 cw(c16.902,27.37) 16.902,27.788 cw(c16.902,28.206) v1@16.607,27.91 ; R50.2 v1(16.485,27.788) 18.068,27.788 18.39,28.11 18.39,30.892 U6.1
  Top Layer w0.6: v1(21.577,24.663) C29.1 23.122,26.242 C35.1 23.062,26.303 L1.1
NetC14_1: C14.1 U1.56 | length 4.5
  Top Layer w0.254: C14.1@13.964,44 14.282,44 15.6,45.318 U1.56
NetC22_1: C22.1 Q1.1 U1.40 | length 13.8
  Top Layer w0.254: Q1.1 6.172,47.765 C22.1
  Top Layer w0.3: v1@6.053,49.132 cw(c5.797,48.876) 6.159,48.876 cw(c6.522,48.876) v1@6.266,49.132 ; Q1.1 v1(6.159,49.238) ; v1(8.585,53.429) 8.607,53.45 U1.40 ; v1@8.691,53.323 cw(c8.999,53.015) 8.999,53.45 ; v1@8.691,53.535 ccw(c8.896,53.739) 8.896,53.45
  Bottom Layer w0.3: v1@6.053,49.344 ccw(c5.767,49.631) 6.172,49.631 ; v1@6.172,49.238 6.172,51.016 v1(8.585,53.429) ; 6.172,49.569 ccw(c6.491,49.569) v1@6.266,49.344 ; v1@8.435,53.429 cw(c8.073,53.429) 8.329,53.173 cw(c8.585,52.917) v1@8.585,53.279
NetC23_1: C23.1 Q1.2 U1.39 | length 5.5
  Top Layer w0.3: Q1.2 6.159,53.84 6.625,54.305 8.712,54.305 9.067,53.95 U1.39
NetC30_1: C30.1 J1.5 R50.1 U6.31 | length 28.1
  Top Layer w0.254: J1.5@13.524,18.609 cw(c12.461,17.546) 13.965,17.546 cw(c15.469,17.546) J1.5@14.406,18.609 ; J1.5@13.704,18.789 cw(c13.074,18.159) 13.965,18.159 cw(c14.856,18.159) J1.5@14.226,18.789 ; J1.5 13.965,16.285 14.797,15.453 15.673,15.453 16.292,16.072 16.292,17.342 17.562,18.612 17.562,19.488 16.844,20.206 16.256,20.206 15.732,20.73 15.732,22.516 ; 15.728,22.517 15.729,22.516 15.732,22.516 ; U6.31@15.732,31.521 U6.31 15.732,25.857 ; R50.1 15.753,25.878 15.732,25.857 ; C30.1 15.732,22.516 ; 15.732,22.516 15.732,25.857
NetC31_1: C31.1 J1.6 R51.1 U6.30 | length 20.2
  Top Layer w0.254: C31.1 15.22,22.516 15.232,22.504 ; R51.1 15.227,25.878 15.232,25.883 ; J1.6@14.794,16.951 ccw(c13.738,18.007) 15.232,18.007 ; J1.6@14.974,16.771 ccw(c14.351,17.394) 15.232,17.394 ; 15.232,17.408 ccw(c16.133,17.408) J1.6@15.496,16.771 ; 15.232,18.021 ccw(c16.746,18.021) J1.6@15.676,16.951 ; U6.30@15.232,31.458 U6.30 15.232,25.883 ; J1.6 15.228,16.517 15.232,16.521 15.232,22.504 ; 15.232,22.504 15.232,25.883
NetC32_1: C32.1 J1.1 R52.1 U6.29 | length 28.2
  Top Layer w0.254: J1.1@8.444,18.609 cw(c7.381,17.546) 8.885,17.546 cw(c10.389,17.546) J1.1@9.326,18.609 ; J1.1@8.624,18.789 cw(c7.994,18.159) 8.885,18.159 cw(c9.776,18.159) J1.1@9.146,18.789 ; J1.1 8.885,16.185 9.617,15.453 10.593,15.453 11.212,16.072 11.212,17.141 12.611,18.54 12.611,20.43 12.37,20.671 12.37,22.504 ; C32.1 12.381,22.516 12.37,22.504 ; R52.1 12.413,25.878 12.37,25.921 ; U6.29@14.728,31.45 14.728,30.222 12.37,27.864 12.37,25.921 ; 12.37,22.504 12.37,25.921
NetC33_1: C33.1 J1.2 R53.1 U6.28 | length 21.9
  Top Layer w0.254: J1.2@9.714,16.951 ccw(c8.651,18.014) 10.155,18.014 ccw(c11.659,18.014) J1.2@10.596,16.951 ; J1.2@9.894,16.771 ccw(c9.264,17.401) 10.155,17.401 ccw(c11.046,17.401) J1.2@10.416,16.771 ; J1.2 10.155,19.275 11.874,20.994 11.874,22.555 ; C33.1 11.835,22.516 11.874,22.555 ; R53.1 11.854,25.865 11.874,25.845 ; U6.28@14.228,31.45 14.228,30.344 11.874,27.991 11.874,25.845 ; 11.874,22.555 11.874,25.845
NetD2_2: D2.2 X3.1 | length 7.5
  Top Layer w0.8: D2.2 6.604,72.263 X3.1 ; X3.1@6.18,75.649 cw(c5.155,74.624) 6.604,74.624 cw(c8.053,74.624) X3.1@7.028,75.649
NetJ1_9: J1.9 JP5.1 | length 9.2
  Bottom Layer w1: J1.9 25.019,19.05 JP5.1@27.305,21.336
NetJ1_10: J1.10 JP5.2 | length 7.9
  Bottom Layer w1: J1.10 25.019,16.51 JP5.2@27.305,18.796
NetJ1_11: J1.11 U6.3 | length 50.4
  Top Layer w0.254: J1.11@10.51,5.407 cw(c10.51,3.782) 11.659,4.931 cw(c12.808,6.08) J1.11@11.183,6.08 ; J1.11@10.51,5.661 cw(c10.51,4.649) 11.225,5.365 cw(c11.941,6.08) J1.11@10.929,6.08 ; J1.11 12.17,4.42 21.742,4.42 25.082,7.76 25.082,17.59 19.621,23.05 19.621,31.991 18.363,33.25 U6.3
NetJ1_13: J1.13 R2.2 U6.2 | length 37.8
  Top Layer w0.254: U6.2 18.075,32.75 18.974,31.852 18.974,22.644 24.359,17.259 24.359,9.982 21.958,7.582 20.192,7.582 J1.13 ; J1.13@18.69,6.499 ccw(c18.69,7.511) 19.405,6.795 ccw(c20.121,6.08) J1.13@19.109,6.08 ; J1.13@18.69,6.753 ccw(c18.69,8.378) 19.839,7.229 ccw(c20.988,6.08) J1.13@19.363,6.08
NetJP1_1: JP1.1 U1.16 | length 6.1
  Top Layer w0.254: U1.16 24.292,56.95 24.778,56.464 JP1.1 ; JP1.1@25.644,56.2 ccw(c25.008,55.564) 25.008,56.464 ccw(c25.008,57.365) JP1.1@25.644,56.728
NetJP1_3: JP1.3 U1.15 | length 7
  Top Layer w0.254: U1.15 23.382,56.45 JP1.3 ; JP1.3@25.535,53.924 ccw(c24.635,53.924) 25.271,54.561 ccw(c25.908,55.198) JP1.3@25.908,54.297
NetJP1_4: JP1.4 R1.1 U1.7 | length 9
  Top Layer w0.3: U1.7 22.531,52.45 22.733,52.248 24.498,52.248 24.905,52.654 JP1.4 27.529,52.654 R1.1 ; JP1.4@25.661,52.407 ccw(c25.063,51.809) 25.063,52.654 ccw(c25.063,53.499) JP1.4@25.661,52.902 ; JP1.4@26.155,52.407 cw(c26.753,51.809) 26.753,52.654 cw(c26.753,53.499) JP1.4@26.155,52.902
NetJP2_3: JP2.3 U1.54 | length 37.5
  Top Layer w0.254: JP2.3 3.696,25.794 3.696,43.028 4.508,43.84 8.877,43.84 10.079,45.043 13.928,45.043 14.6,45.715 U1.54 ; JP2.3@1.905,24.372 ccw(c1.905,25.263) 2.535,24.633 ccw(c3.165,24.003) JP2.3@2.274,24.003 ; JP2.3@1.905,24.626 ccw(c1.905,26.13) 2.969,25.067 ccw(c4.032,24.003) JP2.3@2.528,24.003
NetJP6_1: JP6.1 U1.50 | length 23.7
  Top Layer w0.254: 1.409,40.894 ccw(c-0.095,40.894) 0.968,41.958 ccw(c2.032,43.021) 2.032,41.517 ; JP6.1@1.663,40.894 ccw(c0.772,40.894) 1.402,41.524 ccw(c2.032,42.154) JP6.1@2.032,41.263 ; JP6.1@2.032,40.894 0.559,42.367 0.559,44.171 1.156,44.767 2.472,44.767 3.984,46.279 7.62,46.279 8.369,47.028 11.163,47.028 11.278,47.142 11.278,48.463 11.874,49.06 12.319,49.06 12.6,48.78 U1.50
NetJP6_2: JP6.2 U1.51 | length 17.9
  Top Layer w0.254: JP6.2@2.032,43.434 2.032,43.713 4.102,45.783 7.963,45.783 8.572,46.393 12.838,46.393 13.1,46.655 U1.51 ; 2.032,44.057 ccw(c2.032,44.887) 2.619,44.3 ; JP6.2@2.147,43.434 cw(c3.099,43.434) 2.426,44.107 ; JP6.2@2.401,43.434 cw(c3.966,43.434) 2.859,44.541 ; JP6.2@2.655,43.434 cw(c4.834,43.434) 3.293,44.974
NetJP6_3: JP6.3 U1.44 | length 13.2
  Top Layer w0.3: JP6.3@2.032,45.974 4.293,48.235 4.293,48.959 5.309,49.974 7.887,49.974 9.362,51.45 U1.44 ; 2.032,46.574 ccw(c2.032,48.023) 3.056,46.998 ccw(c4.081,45.974) JP6.3@2.632,45.974
NetJP6_4: JP6.4 U1.43 | length 12
  Top Layer w0.3: JP6.4@2.032,48.514 4.064,50.546 7.696,50.546 9.1,51.95 U1.43 ; 2.032,49.114 ccw(c2.032,50.563) 3.056,49.538 ccw(c4.081,48.514) JP6.4@2.632,48.514
NetJP6_5: JP6.5 U1.53 | length 25
  Top Layer w0.254: v1(3.924,44.412) 8.23,44.412 9.294,45.477 13.6,45.477 14.1,45.977 U1.53 ; v1@4.046,44.29 cw(c4.342,43.994) 4.342,44.412 cw(c4.342,44.83) v1@4.046,44.534
  Bottom Layer w0.254: JP6.5@2.032,50.431 cw(c2.032,48.927) 3.096,49.99 cw(c4.159,51.054) JP6.5@2.655,51.054 ; JP6.5@2.032,50.685 cw(c2.032,49.794) 2.662,50.424 cw(c3.292,51.054) JP6.5@2.401,51.054 ; JP6.5@2.032,51.054 3.924,49.162 v1(3.924,44.412) ; v1@3.802,44.534 ccw(c3.506,44.83) 3.924,44.83 ; 3.924,44.829 ccw(c4.341,44.829) v1@4.046,44.534
NetJP6_6: JP6.6 U1.52 | length 25.5
  Top Layer w0.254: v1@4.547,45.098 8.153,45.098 8.966,45.91 13.183,45.91 13.6,46.327 U1.52 ; v1@4.669,44.988 cw(c4.934,44.723) 4.934,45.098 ; v1@4.669,45.233 ccw(c4.995,45.559) 4.995,45.098
  Bottom Layer w0.254: JP6.6@2.032,52.971 cw(c2.032,51.467) 3.096,52.53 cw(c4.159,53.594) JP6.6@2.655,53.594 ; JP6.6@2.032,53.225 cw(c2.032,52.334) 2.662,52.964 cw(c3.292,53.594) JP6.6@2.401,53.594 ; JP6.6@2.032,53.594 4.547,51.079 v1(4.547,45.11) ; v1@4.424,45.233 ccw(c4.129,45.528) 4.547,45.528 ccw(c4.964,45.528) v1@4.669,45.233
NetJP6_7: JP6.7 U1.42 | length 15.9
  Top Layer w0.254: JP6.7@2.032,55.511 cw(c2.032,54.007) 3.096,55.07 cw(c4.159,56.134) JP6.7@2.655,56.134 ; JP6.7@2.032,55.765 cw(c2.032,54.874) 2.662,55.504 cw(c3.292,56.134) JP6.7@2.401,56.134 ; JP6.7@2.032,56.134 3.95,54.216 3.95,51.956 4.674,51.232 7.556,51.232 8.775,52.45 U1.42
NetJP6_8: JP6.8 U1.55 | length 35
  Top Layer w0.254: v1@5.194,43.116 5.194,43.078 9.233,43.078 10.757,44.602 14.135,44.602 15.1,45.567 U1.55 ; v1@5.304,42.994 cw(c5.508,42.791) 5.508,43.078 ; v1@5.304,43.239 ccw(c5.692,43.626) 5.692,43.078
  Bottom Layer w0.254: JP6.8@2.032,58.051 cw(c2.032,56.547) 3.096,57.61 cw(c4.159,58.674) JP6.8@2.655,58.674 ; JP6.8@2.032,58.305 cw(c2.032,57.414) 2.662,58.044 cw(c3.292,58.674) JP6.8@2.401,58.674 ; JP6.8@2.032,58.674 5.182,55.524 5.182,43.129 v1@5.194,43.116 ; v1@5.06,43.239 ccw(c4.765,43.533) 5.182,43.533 ; 5.182,43.535 ccw(c5.601,43.535) v1@5.304,43.239
  other v1: 5.182,43.116
NetJP6_10: JP6.10 X4.1 | length 40.9
  Top Layer w0.8: JP6.10@2.032,63.754 4.064,65.786 4.064,78.74 4.826,79.502 20.32,79.502 23.749,76.073 ; JP6.10@2.032,64.104 ccw(c2.032,64.949) 2.629,64.351 ccw(c3.227,63.754) JP6.10@2.382,63.754 ; 23.149,76.073 ccw(c21.7,76.073) 22.725,77.097 ccw(c23.749,78.122) 23.749,76.673
NetJP6_11: JP6.11 X1.1 | length 32.5
  Bottom Layer w0.8: JP6.11@1.785,66.541 ccw(c1.187,67.139) 2.032,67.139 ccw(c2.877,67.139) JP6.11@2.279,66.541 ; JP6.11@2.032,66.294 2.032,67.744 3.975,69.687 3.975,78.524 4.953,79.502 14.605,79.502 X1.1 ; X1.1@17.434,76.073 ccw(c15.985,76.073) 17.01,77.097 ccw(c18.034,78.122) X1.1@18.034,76.673
NetR8_1: R8.1 U6.9 | length 1.7
  Top Layer w0.254: U6.9 16.232,36.9 R8.1
NetR9_1: R9.1 U6.16 | length 2.5
  Top Layer w0.254: R9.1 12.732,37.454 U6.16
NetR10_1: R10.1 U6.15 | length 2.3
  Top Layer w0.254: R10.1 13.21,38.043 13.21,36.572 U6.15
NetR10_2: R10.2 U1.62 | length 16.7
  Top Layer w0.3: v1@12.505,41.258 cw(c12.249,41.002) 12.611,41.002 cw(c12.973,41.002) v1@12.717,41.258 ; v1(12.611,41.364) 12.611,39.641 R10.2 ; U1.62 18.6,41.814 18.999,41.415 v1(18.999,41.364) ; 18.707,41.707 cw(c18.364,41.364) v1@18.849,41.364
  Bottom Layer w0.3: v1(12.611,41.364) v1(18.999,41.364) ; v1@12.717,41.258 cw(c12.973,41.002) 12.973,41.364 cw(c12.973,41.726) v1@12.717,41.47 ; v1@18.893,41.258 ccw(c18.637,41.002) 18.637,41.364 ccw(c18.637,41.726) v1@18.893,41.47
NetR11_1: R11.1 U6.13 | length 2.1
  Top Layer w0.254: R11.1 13.767,37.706 14.232,37.241 U6.13
NetR11_2: R11.2 U1.64 | length 16.9
  Top Layer w0.3: v1@13.661,42.63 cw(c13.405,42.374) 13.767,42.374 ; R11.2 v1(13.767,42.736) ; 13.767,42.373 cw(c14.13,42.373) v1@13.873,42.63 ; U1.64 20.002,47.247 v1(20.002,42.735) ; v1@19.896,42.842 ccw(c19.64,43.098) 20.002,43.098 ccw(c20.365,43.098) v1@20.109,42.842
  Bottom Layer w0.3: v1(13.767,42.736) v1(20.002,42.735) ; v1@13.873,42.63 cw(c14.128,42.375) 14.128,42.735 ; v1@13.873,42.842 ccw(c14.13,43.099) 14.13,42.735 ; v1@19.896,42.629 ccw(c19.64,42.373) 19.64,42.735 ccw(c19.64,43.098) v1@19.896,42.842
NetR12_1: R12.1 U1.60 | length 9.1
  Top Layer w0.3: R12.1 17.6,40.871 U1.60
NetR12_2: R12.2 U6.10 | length 1.8
  Top Layer w0.254: U6.10 15.732,37.309 15.989,37.567 R12.2
NetR13_1: R13.1 U6.11 | length 1.8
  Top Layer w0.254: R13.1@15.062,38.21 15.062,37.643 15.232,37.473 U6.11
  Top Layer w0.3: R13.1@15.062,38.21 R13.1
NetR13_2: R13.2 U1.61 | length 13.9
  Top Layer w0.254: v1@14.978,40.2 cw(c14.683,39.905) 15.1,39.905 cw(c15.518,39.905) v1@15.223,40.2 ; R13.2 v1(15.1,40.322)
  Top Layer w0.3: v1@17.994,40.428 ccw(c17.737,40.684) 18.1,40.684 ccw(c18.462,40.684) v1@18.206,40.428 ; U1.61 v1(18.1,40.322) v1@18.125,40.337
  Bottom Layer w0.3: v1(15.1,40.322) 15.088,40.322 15.097,40.328 v1@15.113,40.337 ; v1@15.206,40.216 cw(c15.498,39.925) 15.498,40.337 ; v1@15.206,40.429 ccw(c15.427,40.649) 15.427,40.337 ; 17.701,40.337 cw(c17.701,39.923) v1@17.994,40.216 ; 17.774,40.337 ccw(c17.774,40.647) v1@17.994,40.428 ; v1@18.125,40.337 v1@15.113,40.337 ; v1@15.113,40.337 15.111,40.321 v1@15.113,40.337
NetR14_2: R14.2 U6.32 | length 1.4
  Top Layer w0.254: R14.2@16.232,30.505 U6.32
  Top Layer w0.3: R14.2@16.232,30.505 R14.2
NetR15_1: R15.1 U7.3 | length 2.5
  Top Layer w0.254: R15.1 21.497,34.293 U7.3 U7.3@21.238,35.234
NetR15_2: R15.2 U1.63 U6.5 | length 20
  Top Layer w0.254: U6.5 18.15,34.25 v1(18.517,33.884) 19.164,33.236 R15.2 ; v1@18.344,33.884 ccw(c17.926,33.884) 18.221,34.179 ccw(c18.517,34.474) v1@18.517,34.057 ; v1@18.517,33.711 cw(c18.517,33.293) 18.812,33.588 cw(c19.107,33.884) v1@18.69,33.884 ; v1@19.1,39.276 ccw(c19.1,39.629) 19.349,39.38 ; U1.63 19.1,42.584 19.761,41.923 19.761,39.792 19.1,39.13 v1@19.126,39.103 ; v1@19.273,39.103 cw(c19.756,39.103) 19.414,39.445
  Bottom Layer w0.254: v1(18.517,33.884) 19.1,34.467 v1@19.1,39.054 ; v1@18.978,38.981 cw(c18.682,38.686) 19.1,38.686 cw(c19.518,38.686) v1@19.222,38.981 ; v1@19.05,39.054 v1(19.1,39.103)
NetU1_1: U1.1 U6.21 | length 28.5
  Top Layer w0.254: v1@11.384,42.672 cw(c10.966,42.672) 11.262,42.377 cw(c11.557,42.081) v1@11.557,42.499 ; v1(11.557,42.672) 10.77,41.885 10.77,34.125 11.144,33.75 U6.21 ; v1@21.303,44.496 ccw(c21.068,44.73) 21.4,44.73 ; 21.4,44.853 ccw(c21.904,44.853) v1@21.547,44.496 ; U1.1 21.4,44.399 v1(21.425,44.374)
  Bottom Layer w0.254: v1(11.557,42.672) 13.259,44.374 v1(21.425,44.374) ; v1@11.557,42.845 ccw(c11.557,43.263) 11.852,42.967 ccw(c12.148,42.672) v1@11.73,42.672 ; v1@21.303,44.251 ccw(c21.007,43.956) 21.007,44.374 ccw(c21.007,44.791) v1@21.303,44.496
NetU1_2: U1.2 U6.22 | length 32.9
  Top Layer w0.254: v1@10.457,42.723 cw(c10.039,42.723) 10.335,42.427 cw(c10.63,42.132) v1@10.63,42.55 ; v1(10.63,42.723) 10.173,42.266 10.173,34.099 11.022,33.25 U6.22 ; U1.2 22.681,49.95 22.885,49.746 v1(22.885,45.199) ; v1@22.763,45.322 ccw(c22.468,45.617) 22.885,45.617 ccw(c23.303,45.617) v1@23.008,45.322
  Bottom Layer w0.254: v1(10.63,42.723) 13.106,45.199 v1(22.885,45.199) ; v1@10.63,42.896 ccw(c10.63,43.313) 10.925,43.018 ccw(c11.221,42.723) v1@10.803,42.723 ; v1@22.763,45.077 ccw(c22.468,44.782) 22.468,45.199 ccw(c22.468,45.617) v1@22.763,45.322
NetU1_3: U1.3 U6.23 | length 36.1
  Top Layer w0.254: v1@9.136,42.346 cw(c8.841,42.051) 9.258,42.051 cw(c9.676,42.051) v1@9.381,42.346 ; v1@9.271,42.469 v1(9.258,42.469) 9.258,34.138 10.646,32.75 U6.23
  Top Layer w0.3: U1.3 22.981,50.45 23.647,49.784 v1(23.647,45.949) ; v1@23.541,46.055 ccw(c23.285,46.311) 23.647,46.311 ccw(c24.01,46.311) v1@23.753,46.055
  Bottom Layer w0.3: v1(9.258,42.469) v1@9.271,42.469 ; v1@9.258,42.619 ccw(c9.258,42.981) 9.514,42.725 ccw(c9.77,42.469) v1@9.408,42.469 ; v1@9.265,42.475 12.738,45.949 v1(23.647,45.949) ; v1@23.541,45.843 ccw(c23.285,45.586) 23.285,45.949 ccw(c23.285,46.311) v1@23.541,46.055
NetU1_17: U1.17 U4.1 | length 11.4
  Top Layer w0.3: U4.1 18.898,65.866 18.898,66.065 v1(18.999,66.065) ; U1.17 21.082,60.233 v1(21.082,66.167)
  Bottom Layer w0.3: v1(18.999,66.065) 19.101,66.167 v1(21.082,66.167)
NetU1_21: U1.21 U3.1 | length 15.3
  Top Layer w0.254: U1.21 17.6,60.868 20.46,63.729 20.46,70.498 19.952,71.006 U3.1
NetU1_29: U1.29 U3.6 U4.6 | length 21.1
  Top Layer w0.3: v1@13.494,62.238 cw(c13.239,61.983) 13.6,61.983 ; U1.29 v1(13.6,62.344) ; 13.6,61.981 cw(c13.963,61.981) v1@13.706,62.238 ; v1@21.768,64.529 22.39,63.906 23.773,63.906 U4.6 ; v1@21.768,64.554 21.768,67.678 22.555,68.466 U3.6
  Bottom Layer w0.3: v1(13.6,62.344) 15.809,64.554 v1(21.78,64.554) ; v1@13.6,62.494 ccw(c13.6,62.855) 13.855,62.6 ; v1@13.75,62.344 cw(c14.113,62.344) 13.856,62.601
NetU1_30: U1.30 U6.17 | length 27.8
  Top Layer w0.254: v1(11.633,36.982) 11.659,36.982 11.932,36.709 U6.17 ; v1@12.971,50.364 ccw(c12.662,50.673) 13.1,50.673 ; v1(13.094,50.241) 13.1,50.235 U1.30 ; 13.1,50.645 ccw(c13.497,50.645) v1@13.216,50.364
  Bottom Layer w0.254: v1(11.633,36.982) 8.331,40.284 8.331,43.205 13.094,47.968 v1(13.094,50.241) ; v1@12.971,50.119 cw(c12.676,49.824) 13.094,49.824 cw(c13.511,49.824) v1@13.216,50.119
NetU1_31: U1.31 U3.2 U4.2 | length 17.7
  Top Layer w0.3: U1.31 12.6,62.498 14.651,64.549 U4.2 18.238,64.541 19.342,64.541 19.71,64.91 19.71,69.063 19.037,69.736 U3.2
NetU1_32: U1.32 U3.5 U4.5 | length 23.2
  Top Layer w0.254: v1@11.328,60.127 cw(c11.328,59.709) 11.624,60.004 cw(c11.919,60.3) v1@11.501,60.3 ; v1@11.367,60.338 v1(11.328,60.3) 12.1,59.528 U1.32 ; v1@23.193,66.224 ccw(c22.898,66.519) 23.315,66.519 ccw(c23.733,66.519) v1@23.438,66.224 ; v1(23.304,62.37) 23.304,62.773 U4.5 ; v1(23.315,66.102) U3.5
  Bottom Layer w0.254: v1(11.328,60.3) 12.662,61.633 17.704,61.633 18.415,62.344 23.089,62.344 23.315,62.571 v1(23.315,66.102) ; v1@11.328,60.473 ccw(c11.328,60.89) 11.624,60.595 ccw(c11.919,60.3) v1@11.501,60.3 ; v1@23.193,65.979 cw(c22.898,65.684) 23.315,65.684 cw(c23.733,65.684) v1@23.438,65.979
NetU1_36: U1.36 U5.3 | length 6
  Top Layer w0.254: U5.3 7.359,59.392 8.966,57.785 8.966,55.816 9.332,55.45 U1.36
NetU1_49: U1.49
pads on no net: J1.7 J1.8 J1.MH3 J1.MH4 M1.0 M2.0 M3.0 U1.4 U1.5 U1.6 U1.8 U1.11 U1.12 U1.13 U1.14 U1.18 U1.22 U1.23 U1.24 U1.27 U1.28 U1.33 U1.34 U1.35 U1.37 U1.45 U1.46 U1.47 U1.48 U1.58 U1.59 U4.3 U6.4 U6.7 U6.8 U6.14 U6.18 U6.19 U6.20 U6.24 U6.26

## Polygon pours and split planes (outlines as drawn)
NetC13_1 on 3V3 "C13_1" (solid, pour order 2): 7.836,30.975 12.014,33.503 19.05,33.503 22.568,29.451 22.568,13.284 7.836,13.284 7.836,30.975
3V3 on 3V3 "C13_1" (solid, pour order 3): 1.283,14.186 7.506,14.186 7.506,31.598 11.849,34.15 19.05,34.138 23.444,29.388 23.444,14.186 28.207,14.186 28.207,77.381 1.194,77.381 1.283,77.381 1.283,14.186
GND on GND "GND" (solid, pour order 5): 1.46,1.295 28.384,1.295 28.384,80.835 0.648,80.835 0.648,1.295
GND on Bottom Layer "GND" (solid, pour order 9): 9.525,37.046 9.525,30.124 19.304,30.124 18.796,30.124 18.796,37.02

## Keep-outs
Keep-Out Layer:
  the board outline again, w0.254

## Other copper
Top Layer:
  text "MN7" at 21.615,41.059 h2.2
  text "Main1.1" at 2.515,3.988 h1.27 r90
  text "PN10007" at 4.369,3.899 h1.3 r90

## Silkscreen, mask and mechanical layers (free items; w line width, h text height)
Top Solder:
  text "MN7" at 21.615,41.059 h2.2
Poly1:
  lines w0.05: 1.27,14.186 7.493,14.186 7.493,31.585 11.811,34.125 19.05,34.125 22.86,30.188 28.575,30.188 28.448,77.432 1.27,77.432 1.27,14.186 ; 7.836,13.322 20.155,13.322 20.155,19.291 22.568,19.291 22.568,29.451 19.012,33.515 12.027,33.515 7.836,30.975 7.836,13.322
Mechanical 13:
  drawing of 212 lines, arcs and shapes, not listed
Mechanical 15:
  drawing of 255 lines, arcs and shapes, not listed